# Altium PCB PCB Front.PcbDoc
Units mm, origin at the board's own origin, x right, y up, seen from the top; angles counter-clockwise.
Board outline 84 x 60 mm, 2 copper layers (Top Layer, Bottom Layer), stack 1.569 mm thick; 6 components, 20 nets, 54 pads, 0 vias.
Unrouted connection lines stored in the file: 7.
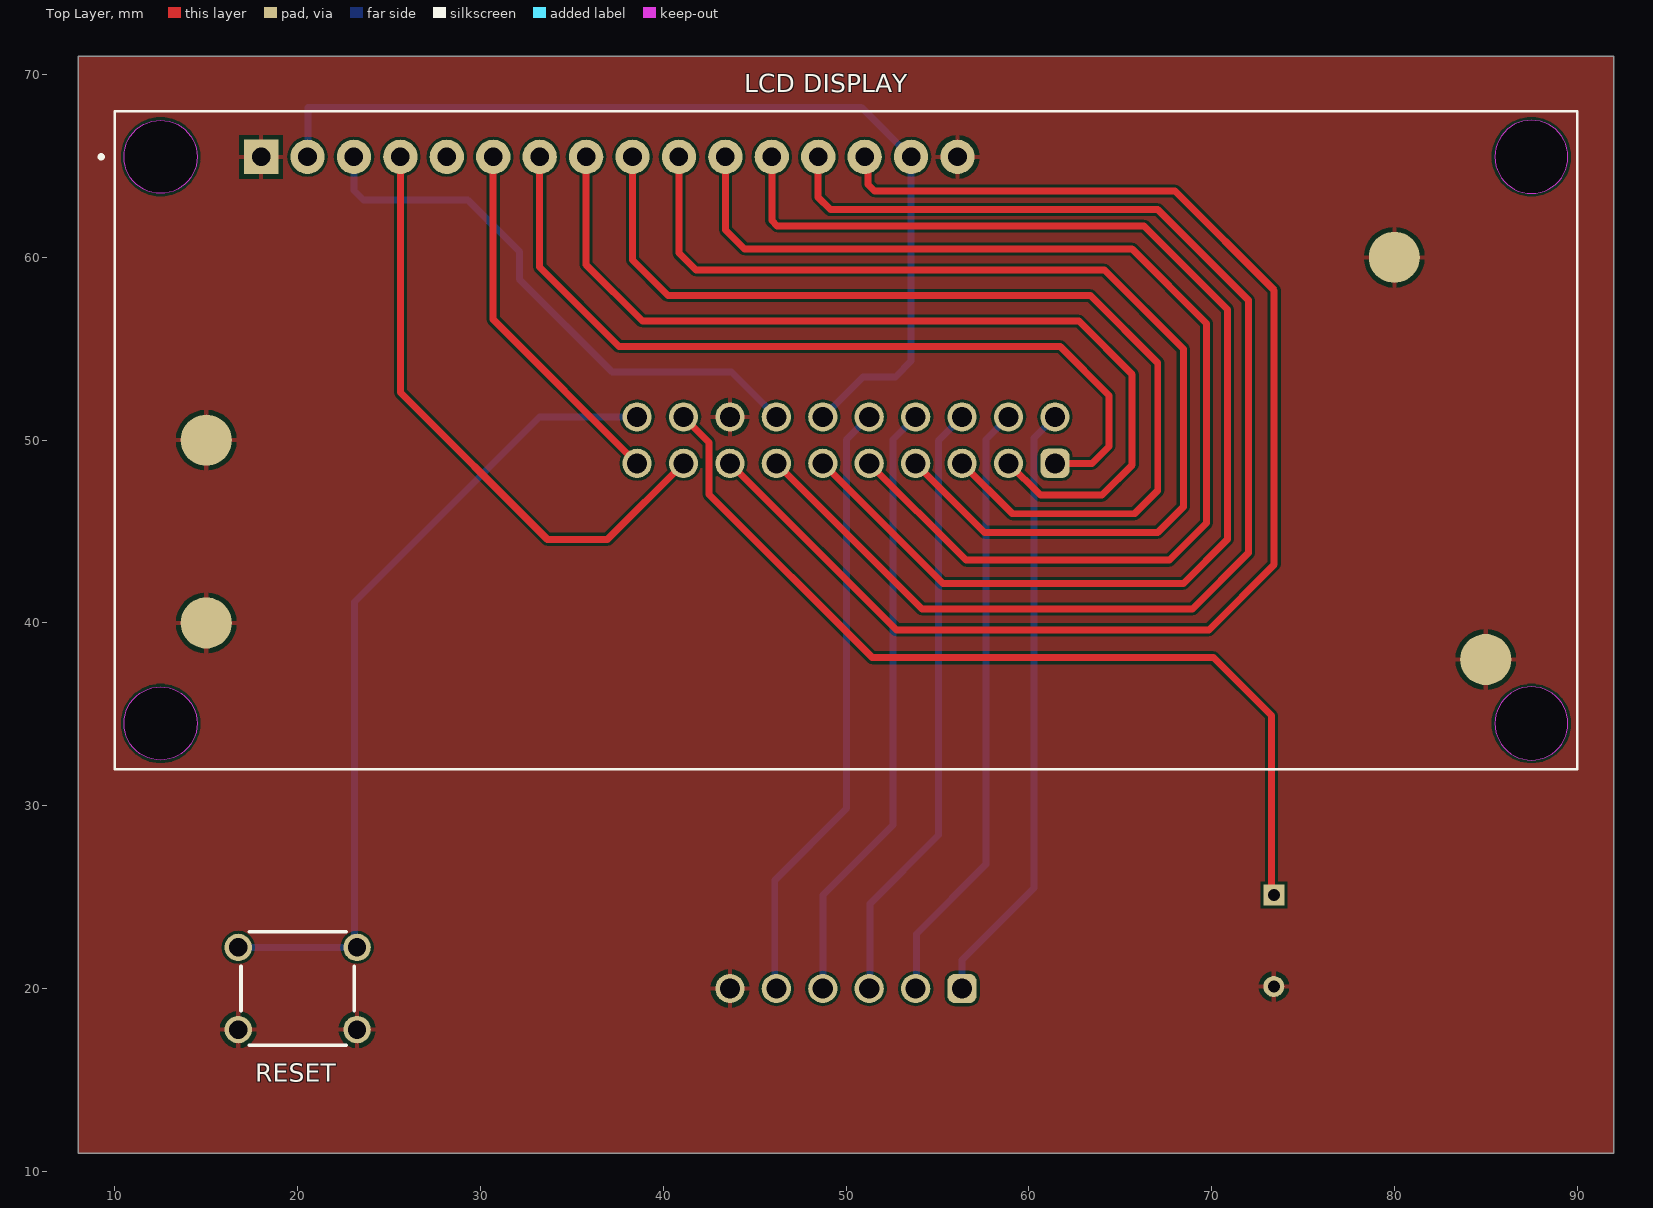
[diagram p0: Top Layer view]
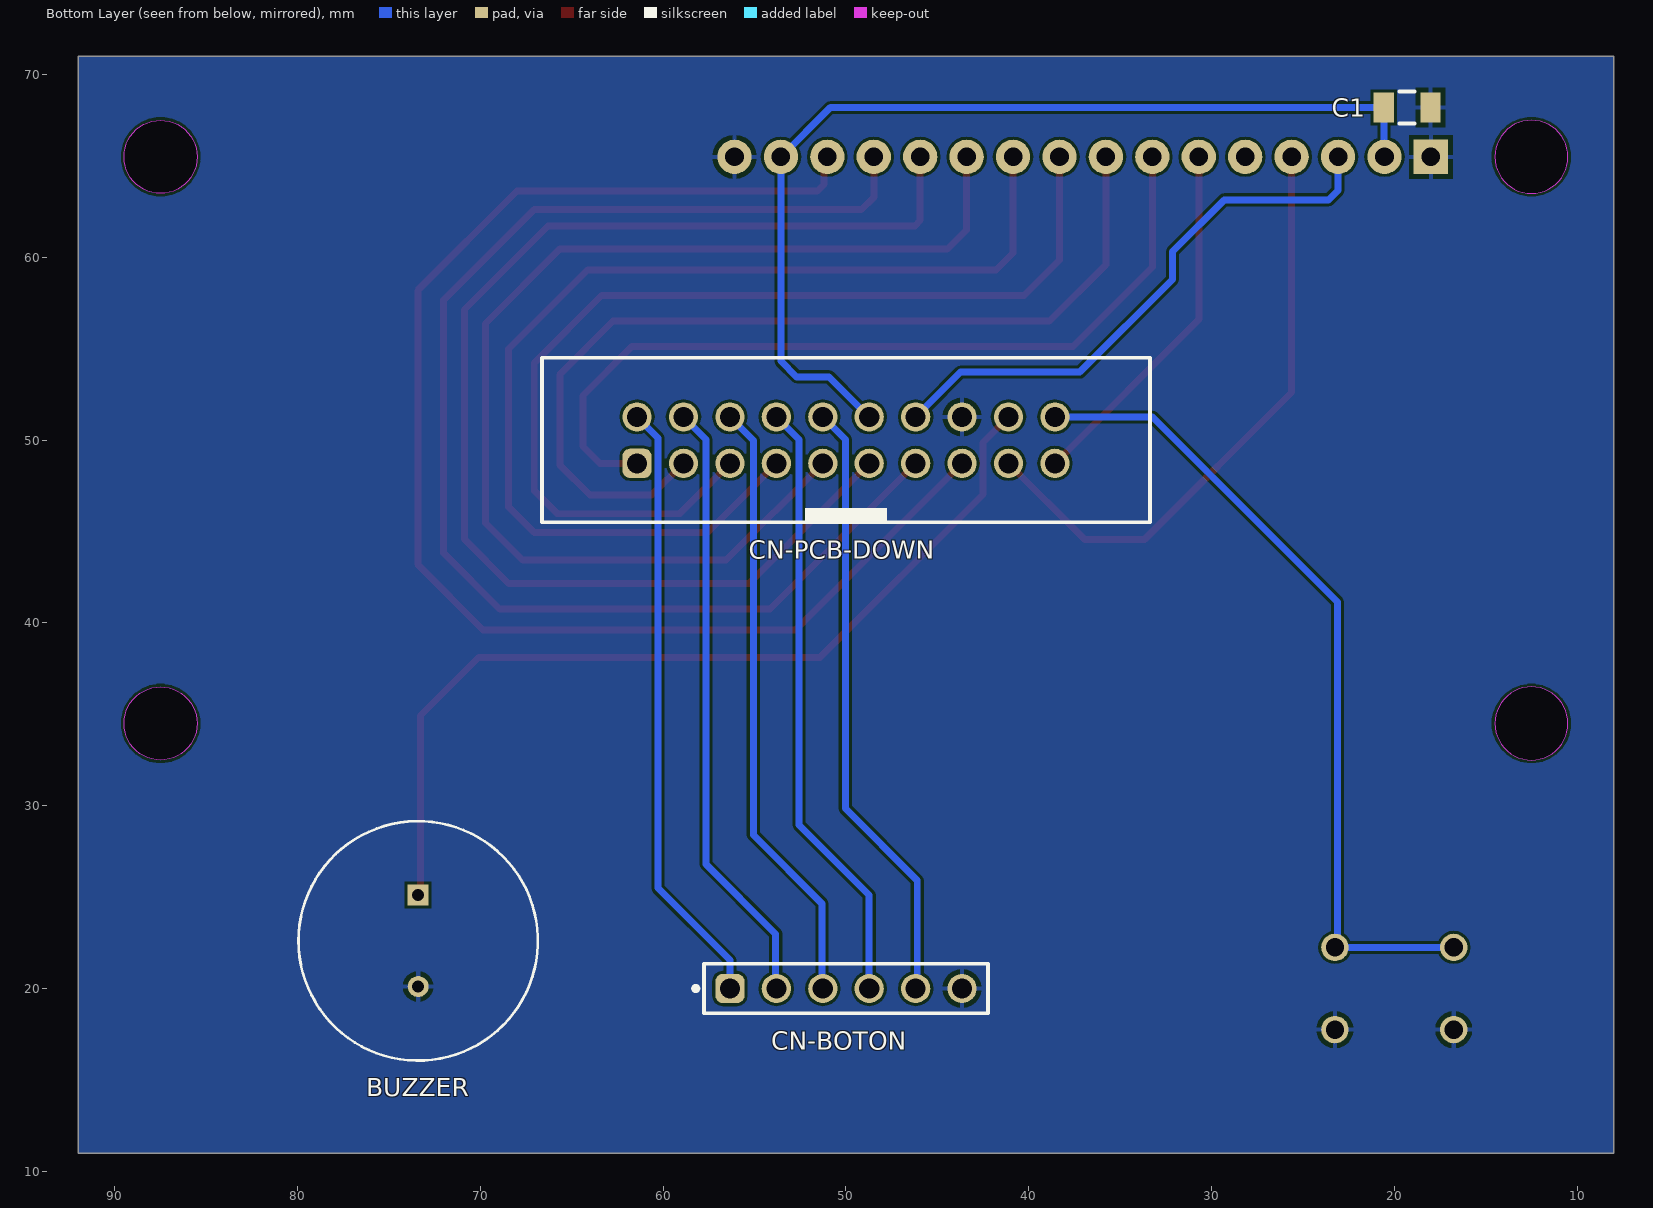
[diagram p1: Bottom Layer view, seen from below]
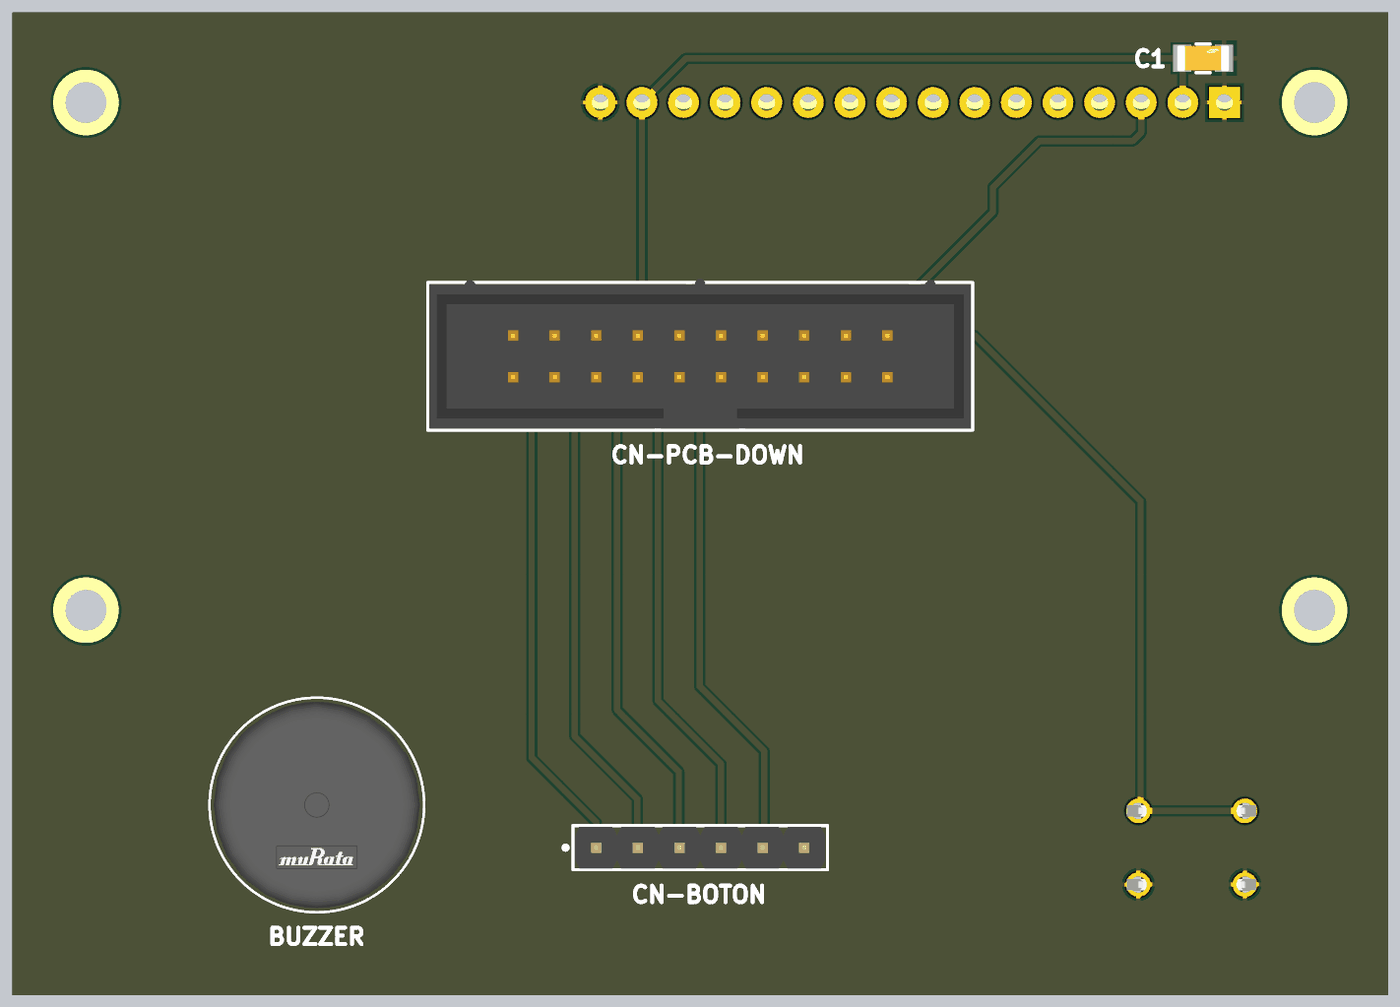
[diagram p2: 3D render of the assembled board from below, using the file's embedded part models]

## Layer stack, top to bottom
Top Solder: solder mask 0.0254, SM-001, Dk 4
Top Layer: signal copper 0.035
Dielectric 1: core 1.4986, Core-043, Dk 4.3
Bottom Layer: signal copper 0.035
Bottom Solder: solder mask 0.0254, SM-001, Dk 4

## Board outline
8,11 8,71 92,71 92,11
cut-out: 85.5,65.5 ccw(c87.5,65.5) 87.5,63.5 ccw(c87.5,65.5) 89.5,65.5 ccw(c87.5,65.5) 87.5,67.5 ccw(c87.5,65.5)
cut-out: 85.5,34.5 ccw(c87.5,34.5) 87.5,32.5 ccw(c87.5,34.5) 89.5,34.5 ccw(c87.5,34.5) 87.5,36.5 ccw(c87.5,34.5)
cut-out: 12.5,32.5 cw(c12.5,34.5) 10.5,34.5 cw(c12.5,34.5) 12.5,36.5 cw(c12.5,34.5) 14.5,34.5 cw(c12.5,34.5)
cut-out: 12.5,63.5 cw(c12.5,65.5) 10.5,65.5 cw(c12.5,65.5) 12.5,67.5 cw(c12.5,65.5) 14.5,65.5 cw(c12.5,65.5)

## Design rules (kind name [scope] priority, off if disabled: settings)
Clearance Clearance_PCBWAY [All] p1: gap=0.15 ignorepadtopadclearanceinfootprint=FALSE
Clearance Clearance_JLPCB [All] p2: gap=0.254 ignorepadtopadclearanceinfootprint=FALSE except(0.127: Arc-SMDPad Track-SMDPad SMDPad-SMDPad; 0.5: Arc-THPad Arc-Hole Track-THPad Track-Hole SMDPad-THPad SMDPad-Hole THPad-THPad THPad-Hole Via-Hole Fill-Hole Poly-Hole Region-Hole Text-Hole)
Clearance Clearance_default [All] p3: gap=0.254 ignorepadtopadclearanceinfootprint=FALSE
HoleSize HoleSize_JLPCB [All] p1: absolutevalues=TRUE maxlimit=6.3 minlimit=0.2 maxpercent=80.000 minpercent=20.000
HoleSize HoleSize_default [All] p2: absolutevalues=TRUE maxlimit=2.54 minlimit=0.025 maxpercent=80.000 minpercent=20.000
MinimumAnnularRing MinimumAnnularRing_JLPCB [All] p1: minimumring=0.13 // 1oz
MinimumAnnularRing MinimumAnnularRing_default [All] p2: minimumring=0.254
MinimumSolderMaskSliver MinimumSolderMaskSliver_PCBWAY [All] p1: minsoldermaskwidth=0.15
MinimumSolderMaskSliver MinimumSolderMaskSliver_default [All] p2: minsoldermaskwidth=0.254
PolygonConnect [All] p1: connectstyle=Relief reliefconductorwidth=0.254 reliefentries=4 polygonreliefangle="90 Angle" airgapwidth=0.254
RoutingVias [All] p1: holewidth=0.711 width=1.27 viastyle="Through Hole" minholewidth=0.711 minwidth=1.27 maxholewidth=0.711 maxwidth=1.27
SMDNeckDown [All] p1: percent=50.000
SilkToSolderMaskClearance SilkToSolderMaskClearance_PCBWAY [IsPad] p1: minsilkscreentomaskgap=0.12 clearancetoexposedcopper=TRUE
SilkToSolderMaskClearance SilkToSolderMaskClearance_default [IsPad] p2: minsilkscreentomaskgap=0.254 clearancetoexposedcopper=TRUE
SolderMaskExpansion [All] p1: expansion=0.102 istentingtop=FALSE
Width Width_PCBWAY [All] p1: maxlimit=5 minlimit=0.1 preferedwidth=0.254
Width Width_JLPCB [All] p2: maxlimit=0.254 minlimit=0.127 preferedwidth=0.254
Width Width_default [All] p3: maxlimit=0.254 minlimit=0.254 preferedwidth=0.254
27 further rules are at their usual default settings.

## Components (designator, comment, footprint, x,y, rotation, side; value= is the part's Value field where it differs from the comment)
BUZZER "PKM13EPYH4000-A0" FP-PKM13EPYH4000-A0-MFG 73.406,22.606 r270 bottom
C1 "CL31B104KBCNFNC" FP-CL31-IPC_C 19.3,68.2 r180 bottom locked
CN-BOTON "61300611121" 61300611121 50,20 r180 bottom
CN-PCB-DOWN "61202021621" 61202021621 50,50 r180 bottom locked
"LCD DISPLAY" "LCD-16X2" MODULE_LCD-16X2 50,50 r0 top locked
RESET "430156050736" 4301x60507x6 20,20 r0 top locked

## Footprints (in the part's own frame and the unit in brackets; to place one, negate y for a bottom-side part, rotate by r counter-clockwise, add the part's x,y. Pads: shape width x height; smd on the part's side, far side on the other; paste and mask are expansions set on the pad)
4301x60507x6 [mm] "6x6mm Tact Switch, THT version"
  round 1.5 hole 1: A1(-3.25,2.25) A2(3.25,2.25) B1(-3.25,-2.25) B2(3.25,-2.25)
  silkscreen extent -3.1,-3.1 3.1,3.1, body extent -3.95,-3.1 3.95,3.1, height 5.05
61202021621 [mm] "20 pins, straight, gold plating"
  rrect50% 1.6x1.6 hole 1.1: 1(-11.43,-1.27)
  round 1.6 hole 1.1: 2(-11.43,1.27) 3(-8.89,-1.27) 4(-8.89,1.27) 5(-6.35,-1.27) 6(-6.35,1.27) 7(-3.81,-1.27) 8(-3.81,1.27) 9(-1.27,-1.27) 10(-1.27,1.27) 11(1.27,-1.27) 12(1.27,1.27) 13(3.81,-1.27) 14(3.81,1.27) 15(6.35,-1.27) 16(6.35,1.27) 17(8.89,-1.27) 18(8.89,1.27) 19(11.43,-1.27) 20(11.43,1.27)
  silkscreen extent -16.63,-4.5 16.63,4.5, body extent -16.53,-4.42 16.53,4.75, height 9.13
61300611121 [mm] "Pin Header, pitch 2.54 mm, THT, Vertical, single row, 6p"
  rrect50% 1.6x1.6 hole 1.1: 1(-6.35,0)
  round 1.6 hole 1.1: 2(-3.81,0) 3(-1.27,0) 4(1.27,0) 5(3.81,0) 6(6.35,0)
  silkscreen extent -8.34,-1.35 7.77,1.35, body extent -7.62,-1.27 7.62,1.27, height 8.57
FP-CL31-IPC_C [mm]
  rect 1.105x1.658 smd paste+0 mask+0: 1(-1.276,0) 2(1.276,0)
  silkscreen extent -0.42,-0.87 0.42,0.87, body extent -1.6,-0.8 1.6,0.8, height 1.4
FP-PKM13EPYH4000-A0-MFG [mm]
  rect 1.15x1.15 hole 0.65 paste-1000 mask+0: 1(-2.5,0)
  round 1.15 hole 0.65 paste-1000 mask+0: 2(2.5,0)
  silkscreen extent -6.55,-6.55 6.55,6.55, body extent -6.3,-6.3 6.3,6.3, height 7.4
MODULE_LCD-16X2 [mil]
  rect 74x74 / inner round 74 / far side rect 74x74 hole 40: 1(-1259.84,610.24)
  round 74 hole 40: 2(-1159.84,610.24) 3(-1059.84,610.24) 4(-959.84,610.24) 5(-859.84,610.24) 6(-759.84,610.24) 7(-659.84,610.24) 8(-559.84,610.24) 9(-459.84,610.24) 10(-359.84,610.24) 11(-259.84,610.24) 12(-159.84,610.24) 13(-59.84,610.24) 14(40.16,610.24) 15(140.16,610.24) 16(240.16,610.24)
  round 110.24 smd: ""(-1377.95,-393.7) ""(-1377.95,0) ""(1181.1,393.7) ""(1377.95,-472.44)
  silkscreen extent -1608,-709 1575,709, body extent -1575,-709 1575,709, height 598

## Part data
BUZZER: library part CMP-06202-000019-1, "AUDIO PIEZO TRANSDUCER 30V TH", Capacitance=5.5nF, Frequency=4kHz, Max Operating Temperature=85°C, Max Supply Voltage=25V, Min Operating Temperature=-40°C, Nominal Input Voltage=3V, Package Quantity=500, Voltage Rating (DC)=30V, Diameter=12.6mm, Height=6.9mm, Lead Free="Lead Free", Max Frequency=4kHz, Mount="Through Hole", Packaging=Bulk, Radiation Hardening=No, REACH SVHC="No SVHC", Self Resonant Frequency=4kHz, Termination=Solder, Voltage Rating=3V, Washable=No
C1: library part CMP-13271-001276-1, "Cap Ceramic 100nF 50V X7R ±10% SMD 1206 +125°C Embossed T/R", Capacitance=100nF, Case Code (Imperial)=1206, Case Code (Metric)=3216, Dielectric=X7R, Max Operating Temperature=125°C, Min Operating Temperature=-55°C, Package Quantity=1, Tolerance=10%, Voltage Rating=50V, Case/Package=1206, Depth=1.6mm, Height=0.85mm, Length=0.126inch, Mount="Surface Mount", Packaging="Tape and Reel", Radiation Hardening=No, Thickness=0.037inch, Width=0.063inch
CN-BOTON: library part CMP-1502-01070-3, Color=Black, Contact Resistance=20mΩ, Current Rating=3A, Max Operating Temperature=105°C, Min Operating Temperature=-40°C, Operating Supply Voltage=250V, Connector Type="Male Pin", Contact Gender=Male, Contact Material=Copper, Contact Mating Length=5.9944mm, Contact Plating=Gold, Gender=Male, Height=8.89mm, Housing Material=PBT, Lead Free="Lead Free", Lead Pitch=2.54mm, Mount="Through Hole", NexarPartId=20084590, Number of Contacts=6, Number of Pins=6, Number of Positions=6, Number of Rows=1, Orientation=Vertical, Packaging=Bulk, Pitch=2.54mm, REACH SVHC=Unknown, RoHS=Compliant, Termination="Through Hole", Voltage Rating=250V
CN-PCB-DOWN: library part CMP-1502-00010-2, Color=Black, Contact Resistance=20mΩ, Current Rating=3A, Flammability Rating="UL94 V-0", Insulation Resistance=1GΩ, Max Operating Temperature=105°C, Min Operating Temperature=-40°C, Operating Supply Voltage=250V, Connector Type="Male Pin", Contact Gender=Male, Contact Material=Copper, Contact Plating=Gold, Gender=Male, Height=8.85mm, Housing Material=PBT, Insulation=Insulated, Insulation Material=PBT, Lead Pitch=2.54mm, Length=33.06mm, Mount="Through Hole", NexarPartId=8917785, Number of Contacts=20, Number of Pins=20, Number of Positions=20, Number of Rows=2, Orientation=Vertical, Pitch=2.54mm, REACH SVHC=Unknown, RoHS=Compliant, Row Spacing=2.54mm, System=Connector, Termination="Through Hole", Voltage Rating=250V, Voltage Rating (DC)=250V, Width=33.06mm
"LCD DISPLAY": "Display Development Tools 16x2 Black on Green Char LCD w Backlight", Manufacturer=Gravitech, Manufacturer Part Number=LCD-16X2Y, Operating Supply Voltage=5V, Package=None, Supplier Part Number 1=992-LCD-16X2Y, Availability="Not in stock", Check_prices=https://www.snapeda.com/parts/LCD-16X2/Gravitech/view-part/?ref=eda, ComponentLink1Description=http://www.gravitech.us/16chblongrlc.html?src-supplier=Mouser, ComponentLink1URL=http://www.gravitech.us/16chblongrlc.html?src-supplier=Mouser, Interface=Parallel, MF=Gravitech, MP=LCD-16X2, Price=None, RoHS=Yes, SnapEDA_Link=https://www.snapeda.com/parts/LCD-16X2/Gravitech/view-part/?ref=snap, Supplier 1=Mouser
RESET: library part CMP-1453-00004-2, Contact Current Rating=50mA, Insulation Resistance=100MΩ, Max Operating Temperature=85°C, Min Operating Temperature=-40°C, Voltage Rating=12V, Actuator Material="Liquid Crystal Polymer, Polymer", Contact Material=Steel, Contact Plating=Silver, Current Rating=50mA, Diameter=3.5mm, Height=5mm, Illumination Type="Illuminated, Non-Illuminated", Length=6.2mm, Mechanical Life=200kcycles, Mount="Through Hole", NexarPartId=38794700, Packaging=Bulk, REACH SVHC="No SVHC", RoHS=Compliant, Switch Function=Off-Mom, Switch Travel=250µm, Termination="PC Pin", Throw Configuration=SPST, Width=6.2mm

## Nets (pads, with @x,y where several pads share a name; then routed paths per layer and width w, separated by ;. In a path a pad name is that pad's centre, name@x,y a point inside that pad or via, vN(x,y) a via of type N, cw(c..) or ccw(c..) an arc to the next point about the centre after c; other vN are vias at no path point)
5vdc: "LCD DISPLAY.2" "LCD DISPLAY.15" C1.1 CN-PCB-DOWN.12 | length 54.1
  Bottom Layer w0.381: 20.54,65.5 20.558,65.518 20.558,68.182 C1.1 50.86,68.2 53.56,65.5 53.56,54.322 52.705,53.467 50.927,53.467 CN-PCB-DOWN.12
BUZZER: BUZZER.1 CN-PCB-DOWN.18 | length 50.5
  Top Layer w0.381: CN-PCB-DOWN.18 42.509,49.87 42.509,47.026 51.435,38.1 70.104,38.1 73.279,34.925 73.279,25.233 BUZZER.1
D0: "LCD DISPLAY.7" CN-PCB-DOWN.1 | length 46.2
  Top Layer w0.381: 33.24,65.5 33.24,59.47 37.592,55.118 61.722,55.118 64.389,52.451 64.389,49.657 63.462,48.73 CN-PCB-DOWN.1
D1: "LCD DISPLAY.8" CN-PCB-DOWN.3 | length 51.4
  Top Layer w0.381: 35.78,65.5 35.78,59.597 38.862,56.515 62.738,56.515 65.659,53.594 65.659,48.641 64.008,46.99 60.63,46.99 CN-PCB-DOWN.3
D2: "LCD DISPLAY.9" CN-PCB-DOWN.5 | length 56.1
  Top Layer w0.381: 38.32,65.5 38.32,59.851 40.259,57.912 63.373,57.912 67.056,54.229 67.056,47.244 65.786,45.974 59.106,45.974 CN-PCB-DOWN.5
D3: "LCD DISPLAY.10" CN-PCB-DOWN.7 | length 60.5
  Top Layer w0.381: 40.86,65.5 40.86,60.232 41.783,59.309 64.135,59.309 68.453,54.991 68.453,46.355 67.056,44.958 57.582,44.958 CN-PCB-DOWN.7
D4: "LCD DISPLAY.11" CN-PCB-DOWN.9 | length 64.8
  Top Layer w0.381: 43.4,65.5 43.4,61.502 44.45,60.452 65.659,60.452 69.723,56.388 69.723,45.466 67.691,43.434 56.566,43.434 CN-PCB-DOWN.9
D5: "LCD DISPLAY.12" CN-PCB-DOWN.11 | length 68.9
  Top Layer w0.381: 45.94,65.5 45.94,62.01 46.228,61.722 66.294,61.722 70.866,57.15 70.866,44.577 68.453,42.164 55.296,42.164 CN-PCB-DOWN.11
D6: "LCD DISPLAY.13" CN-PCB-DOWN.13 | length 72.3
  Top Layer w0.381: CN-PCB-DOWN.13 54.153,40.767 68.961,40.767 72.009,43.815 72.009,57.658 67.056,62.611 49.149,62.611 48.48,63.28 48.48,65.5
D7: "LCD DISPLAY.14" CN-PCB-DOWN.15 | length 76.2
  Top Layer w0.381: CN-PCB-DOWN.15 52.756,39.624 69.85,39.624 73.428,43.202 73.428,58.2 68.001,63.627 51.562,63.627 51.2,63.989 51.2,65.32 51.02,65.5
E: "LCD DISPLAY.6" CN-PCB-DOWN.19 | length 20
  Top Layer w0.381: 30.7,65.5 30.7,56.6 CN-PCB-DOWN.19
GND: "LCD DISPLAY.1" "LCD DISPLAY.16" "LCD DISPLAY." BUZZER.2 C1.2 CN-BOTON.6 CN-PCB-DOWN.16 RESET.B1 RESET.B2
NetCN-PCB-DOWN_17: "LCD DISPLAY.4" CN-PCB-DOWN.17 | length 33.4
  Top Layer w0.381: 25.62,65.5 25.62,52.612 33.655,44.577 36.957,44.577 CN-PCB-DOWN.17
NetCN-PCB-DOWN_20: CN-PCB-DOWN.20 RESET.A1 RESET.A2 | length 45.1
  Bottom Layer w0.381: RESET.A1 RESET.A2 23.114,22.386 23.114,41.148 33.236,51.27 CN-PCB-DOWN.20
S0: CN-BOTON.1 CN-PCB-DOWN.2 | length 33.4
  Bottom Layer w0.381: CN-BOTON.1 56.35,21.552 60.289,25.491 60.289,50.129 CN-PCB-DOWN.2
S1: CN-BOTON.2 CN-PCB-DOWN.4 | length 33.4
  Bottom Layer w0.381: CN-BOTON.2 53.848,20.038 53.848,22.987 57.658,26.797 57.658,50.038 CN-PCB-DOWN.4
S2: CN-BOTON.3 CN-PCB-DOWN.6 | length 33.4
  Bottom Layer w0.381: CN-BOTON.3 51.308,20.038 51.308,24.638 55.072,28.402 55.072,49.992 CN-PCB-DOWN.6
S3: CN-BOTON.4 CN-PCB-DOWN.8 | length 33.4
  Bottom Layer w0.381: CN-BOTON.4 48.73,25.108 52.578,28.956 52.578,50.038 CN-PCB-DOWN.8
S4: CN-BOTON.5 CN-PCB-DOWN.10 | length 33.4
  Bottom Layer w0.381: CN-BOTON.5 46.101,20.089 46.101,25.908 50.038,29.845 50.038,50.038 CN-PCB-DOWN.10
VO: "LCD DISPLAY.3" CN-PCB-DOWN.14 | length 31
  Bottom Layer w0.381: 23.08,65.5 23.08,63.661 23.591,63.15 29.306,63.15 32.131,60.325 32.131,58.801 37.211,53.721 43.739,53.721 CN-PCB-DOWN.14
pads on no net: "LCD DISPLAY.5"

## Polygon pours and split planes (outlines as drawn)
GND on Top Layer "GND_TOP" (solid, pour order 0): 8,11 8,71 92,71 92,11
GND on Bottom Layer "GND_BOTTOM" (solid, pour order 1): 8,11 8,71 92,71 92,11

## Silkscreen, mask and mechanical layers (free items; w line width, h text height)
Mechanical 1:
  circle w0.254: c12.5,34.5 r2
  circle w0.254: c87.5,34.5 r2
  circle w0.254: c87.5,65.5 r2
  circle w0.254: c12.5,65.5 r2
  lines w0.127: 8,11 92,11 92,71 8,71 8,11